# EAGLE board LCD-Header-3pins (EAGLE 5.11)
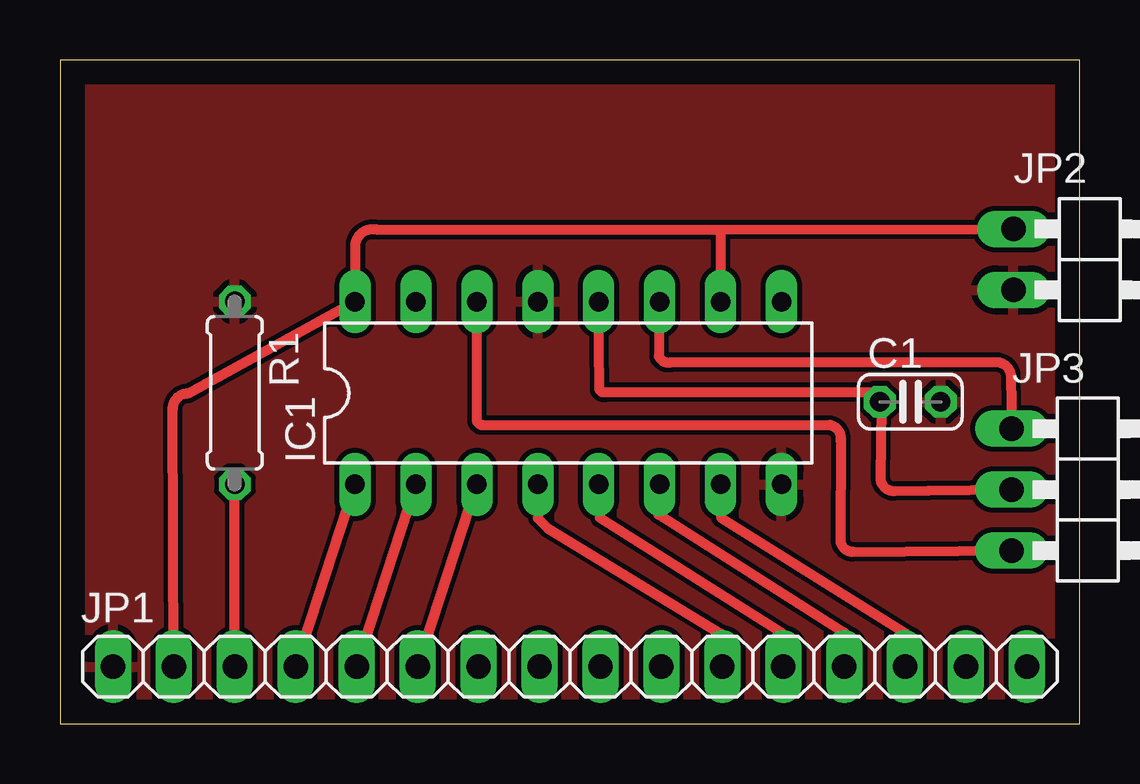
[diagram p0: board, top side]
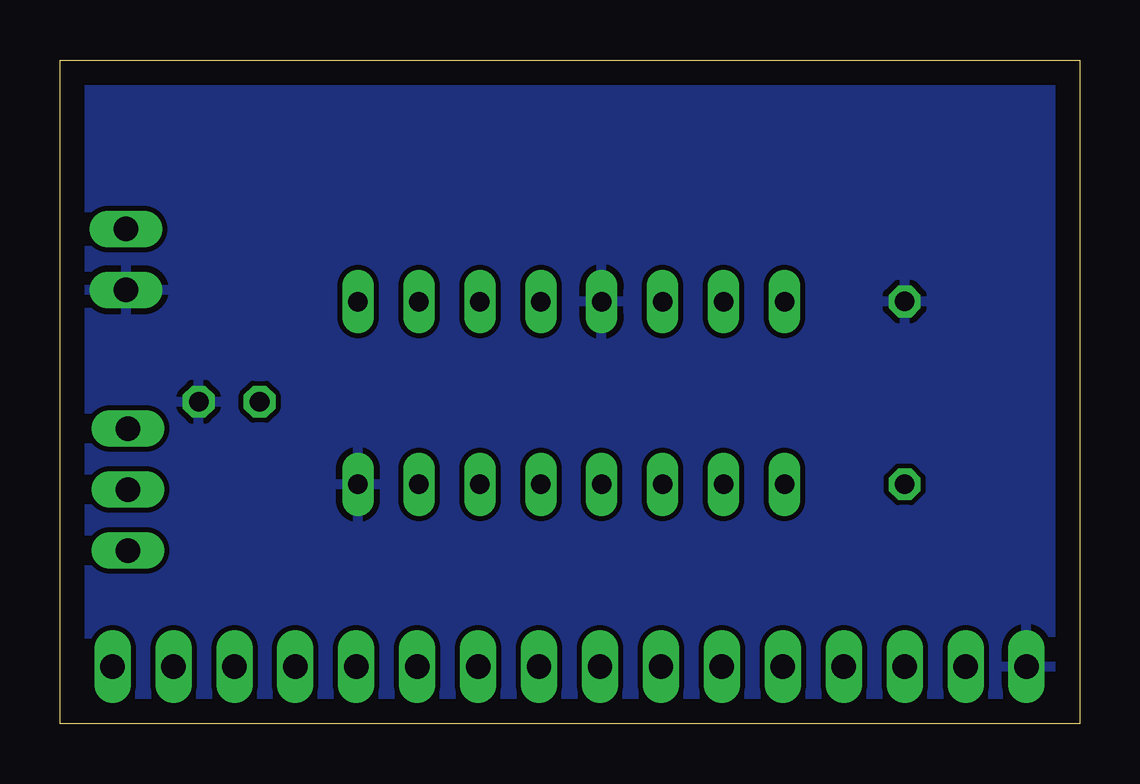
[diagram p1: board, bottom side, seen from below]

Size 42.5 x 27.67 mm. Coordinates in mm from the lower left corner, seen from the top.
Outline: 0,0 42.5,0 42.5,27.67 0,27.67 0,0
Copper layers (1*16): Top 0.035mm / dielectric 1.5mm / Bottom 0.035mm
Design rules "default": minimum track width 10mil, minimum drill 24mil, track to track 8mil, track to pad 8mil, pad to pad 8mil, via to via 8mil, smd to smd 8mil, copper to edge 40mil, drill to drill 8mil, minimum pad ring 10mil, minimum via ring 8mil, stop-mask expansion 4mil, vias tented up to drill 0mil, thermal gap 10mil

## Footprints (pad centres in the part's own frame; a part is rotated, then mirrored left to right if it is on the bottom)
C025-024X044 = drill 0.813 octagon: 1 -1.27,0; 2 1.27,0
DIL16 = drill 0.813 long: 1 -8.89,-3.81; 2 -6.35,-3.81; 3 -3.81,-3.81; 4 -1.27,-3.81; 5 1.27,-3.81; 6 3.81,-3.81; 7 6.35,-3.81; 8 8.89,-3.81; 9 8.89,3.81; 10 6.35,3.81; 11 3.81,3.81; 12 1.27,3.81; 13 -1.27,3.81; 14 -3.81,3.81; 15 -6.35,3.81; 16 -8.89,3.81
1X16 = drill 1.016 long: 1 -19.05,0; 2 -16.51,0; 3 -13.97,0; 4 -11.43,0; 5 -8.89,0; 6 -6.35,0; 7 -3.81,0; 8 -1.27,0; 9 1.27,0; 10 3.81,0; 11 6.35,0; 12 8.89,0; 13 11.43,0; 14 13.97,0; 15 16.51,0; 16 19.05,0
1X02/90 = drill 1.016 long: 1 -2.54,-3.81; 2 0,-3.81
1X03/90 = drill 1.016 long: 1 -2.54,-3.81; 2 0,-3.81; 3 2.54,-3.81
0207/7 = drill 0.813 octagon: 1 -3.81,0; 2 3.81,0

## Placement (x,y rotation side)
C1  104  [C025-024X044]  35.45,13.42 0 top
IC1  74HC595N  [DIL16]  21.19,13.78 0 top
JP1  [1X16]  21.26,2.38 0 top
JP2  [1X02/90]  43.56,18.08 270 top
JP3  [1X03/90]  43.48,9.76 270 top
R1  2K  [0207/7]  7.29,13.79 270 top

## Library data of the parts
C1 R1 = resistor
IC1 = 74xx-eu
JP1-JP3 = pinhead-2

## Nets
CLOCK: IC1.11 JP3.1
DATA: IC1.14 JP3.3
DB4: IC1.4 JP1.11
DB5: IC1.5 JP1.12
DB6: IC1.6 JP1.13
DB7: IC1.7 JP1.14
E: IC1.3 JP1.6
GND: C1.2 IC1.8 IC1.13 JP1.1 JP2.2 R1.1
LATCH: C1.1 IC1.12 JP3.2
N$9: JP1.3 R1.2
RS: IC1.1 JP1.4
RW: IC1.2 JP1.5
VCC: IC1.10 IC1.16 JP1.2 JP2.1

## Tracks (layer width: path | path; a pad name or v marks a point on that pad's centre or on a via)
CLOCK
  Top 0.406: IC1.11 24.97,15.32 arc91 25.49,15.07 39.1,15.07 arc-87 39.64,14.41 JP3.1
DATA
  Top 0.406: IC1.14 17.38,12.67 arc96 17.64,12.45 32.1,12.45 arc-88 32.54,11.78 32.54,7.69 arc94 33.04,7.17 JP3.3
DB4
  Top 0.406: IC1.4 19.92,8.56 20.34,8.13 27.56,3.75 JP1.11
DB5
  Top 0.406: IC1.5 22.51,8.58 30.09,3.79 JP1.12
DB6
  Top 0.406: IC1.6 24.95,8.72 32.7,3.79 JP1.13
DB7
  Top 0.406: IC1.7 27.56,8.58 35.27,3.75 JP1.14
E
  Top 0.406: JP1.6 IC1.3
GND
  pour Bottom: 0,27.5 42.5,27.5 42.5,0 0,0
  pour Top: 0,27.5 42.5,27.5 42.5,0 0,0
LATCH
  Top 0.254: 36.2,9.71 36.2,9.8 | C1.1 34.2,13.4 34.25,13.2
  Top 0.406: IC1.12 22.48,13.94 arc91 22.75,13.82 33.85,13.82 arc-91 34.25,13.2 34.2,10.26 arc91 34.76,9.7 36.2,9.71 JP3.2
N$9
  Top 0.406: JP1.3 R1.2
RS
  Top 0.406: JP1.4 IC1.1
RW
  Top 0.406: JP1.5 IC1.2
VCC
  Top 0.406: JP1.2 4.7,13.11 arc-91 5.34,13.77 IC1.16 12.33,20.08 arc-89 13.18,20.6 27.53,20.6 | 27.53,20.6 IC1.10 | 27.53,20.6 JP2.1